# Altium PCB TrackCommanderCar.PcbDoc
Units mm, origin at the board's own origin, x right, y up, seen from the top; angles counter-clockwise.
Board outline 70 x 60 mm, 2 copper layers (Top Layer, Bottom Layer); 108 components, 77 nets, 428 pads, 54 vias.
Unrouted connection lines stored in the file: 101.
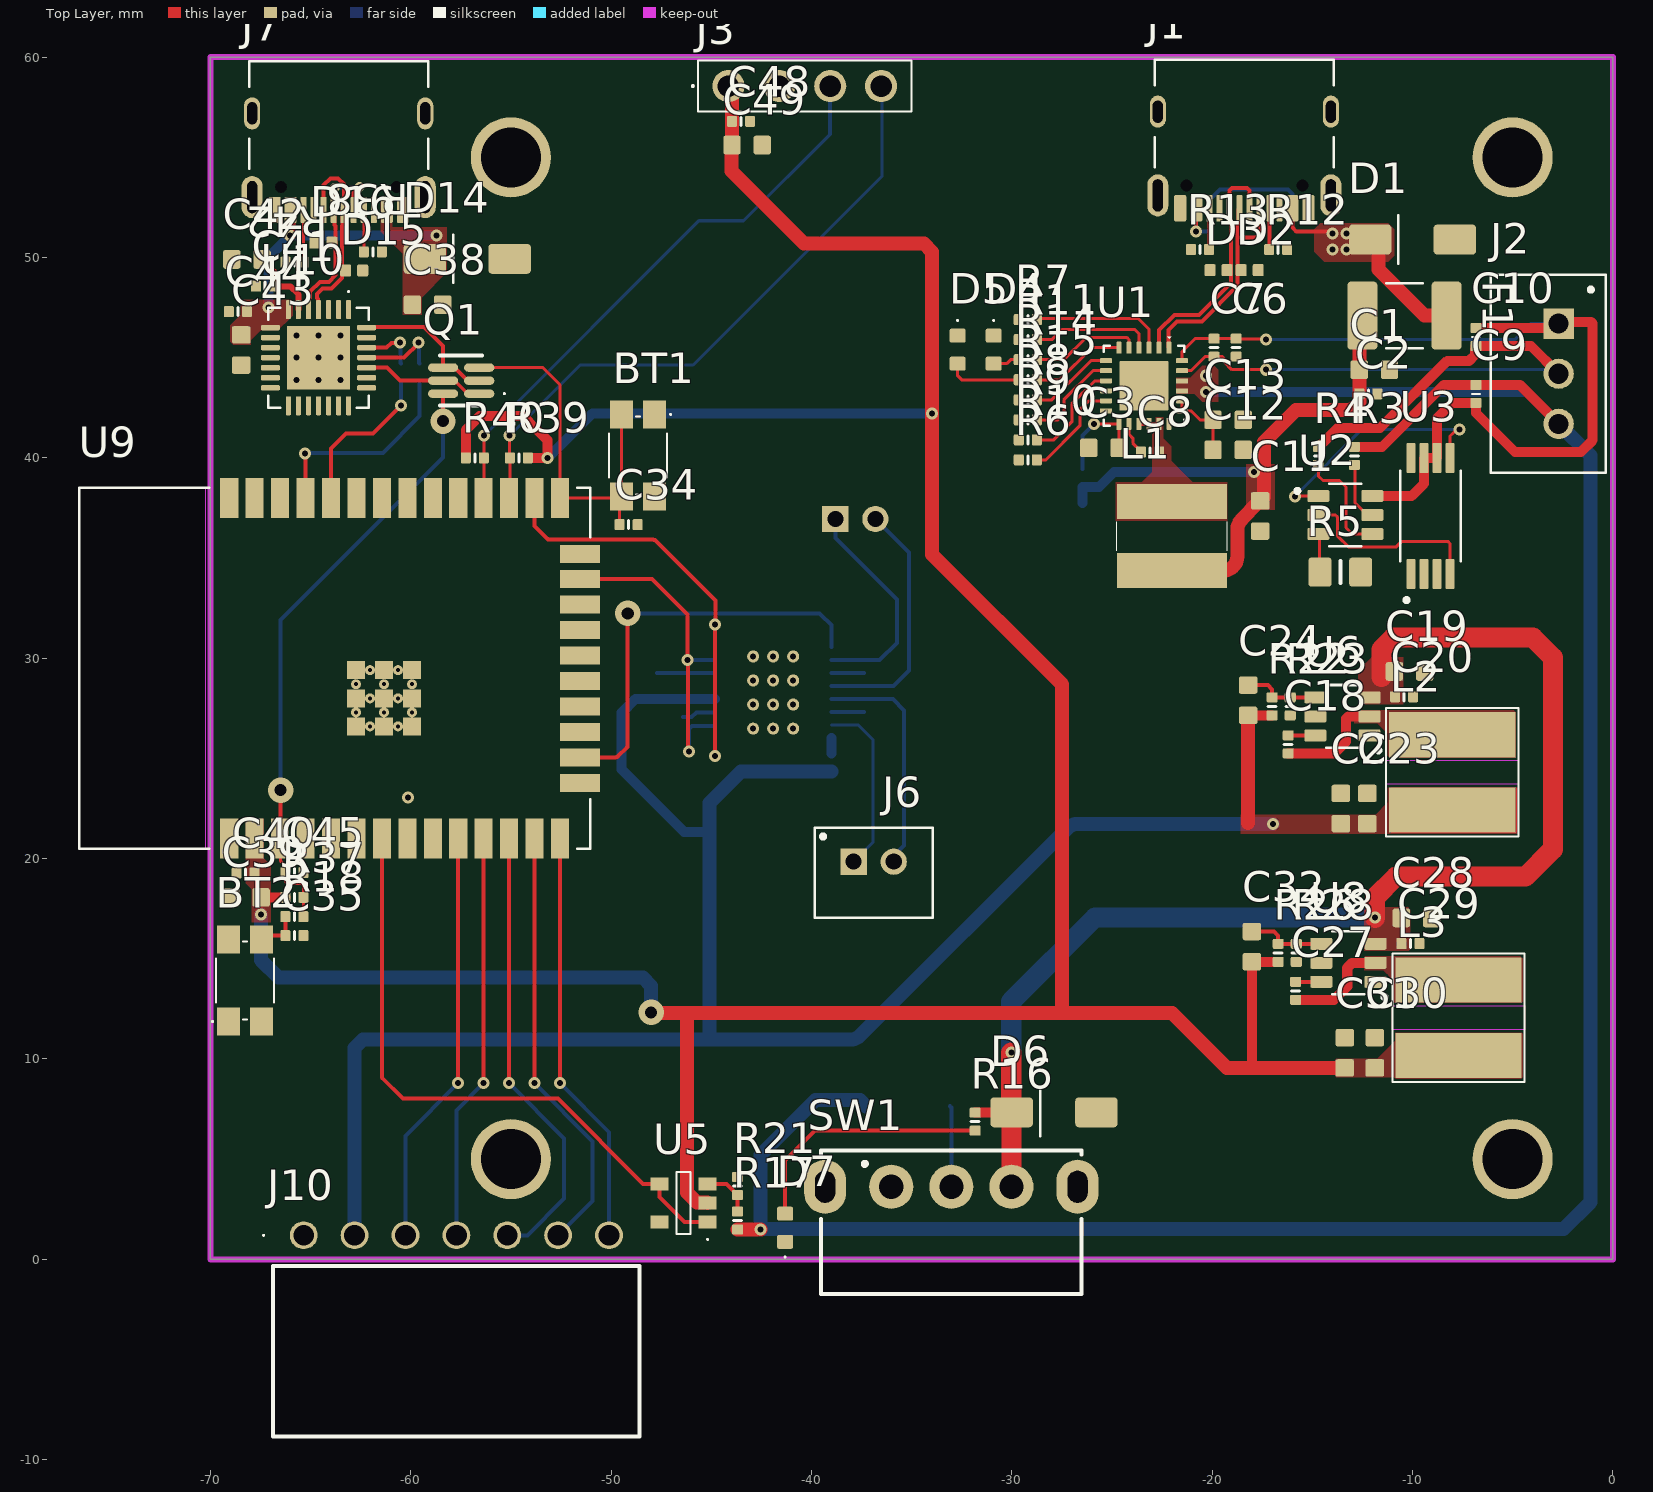
[diagram p0: Top Layer view]
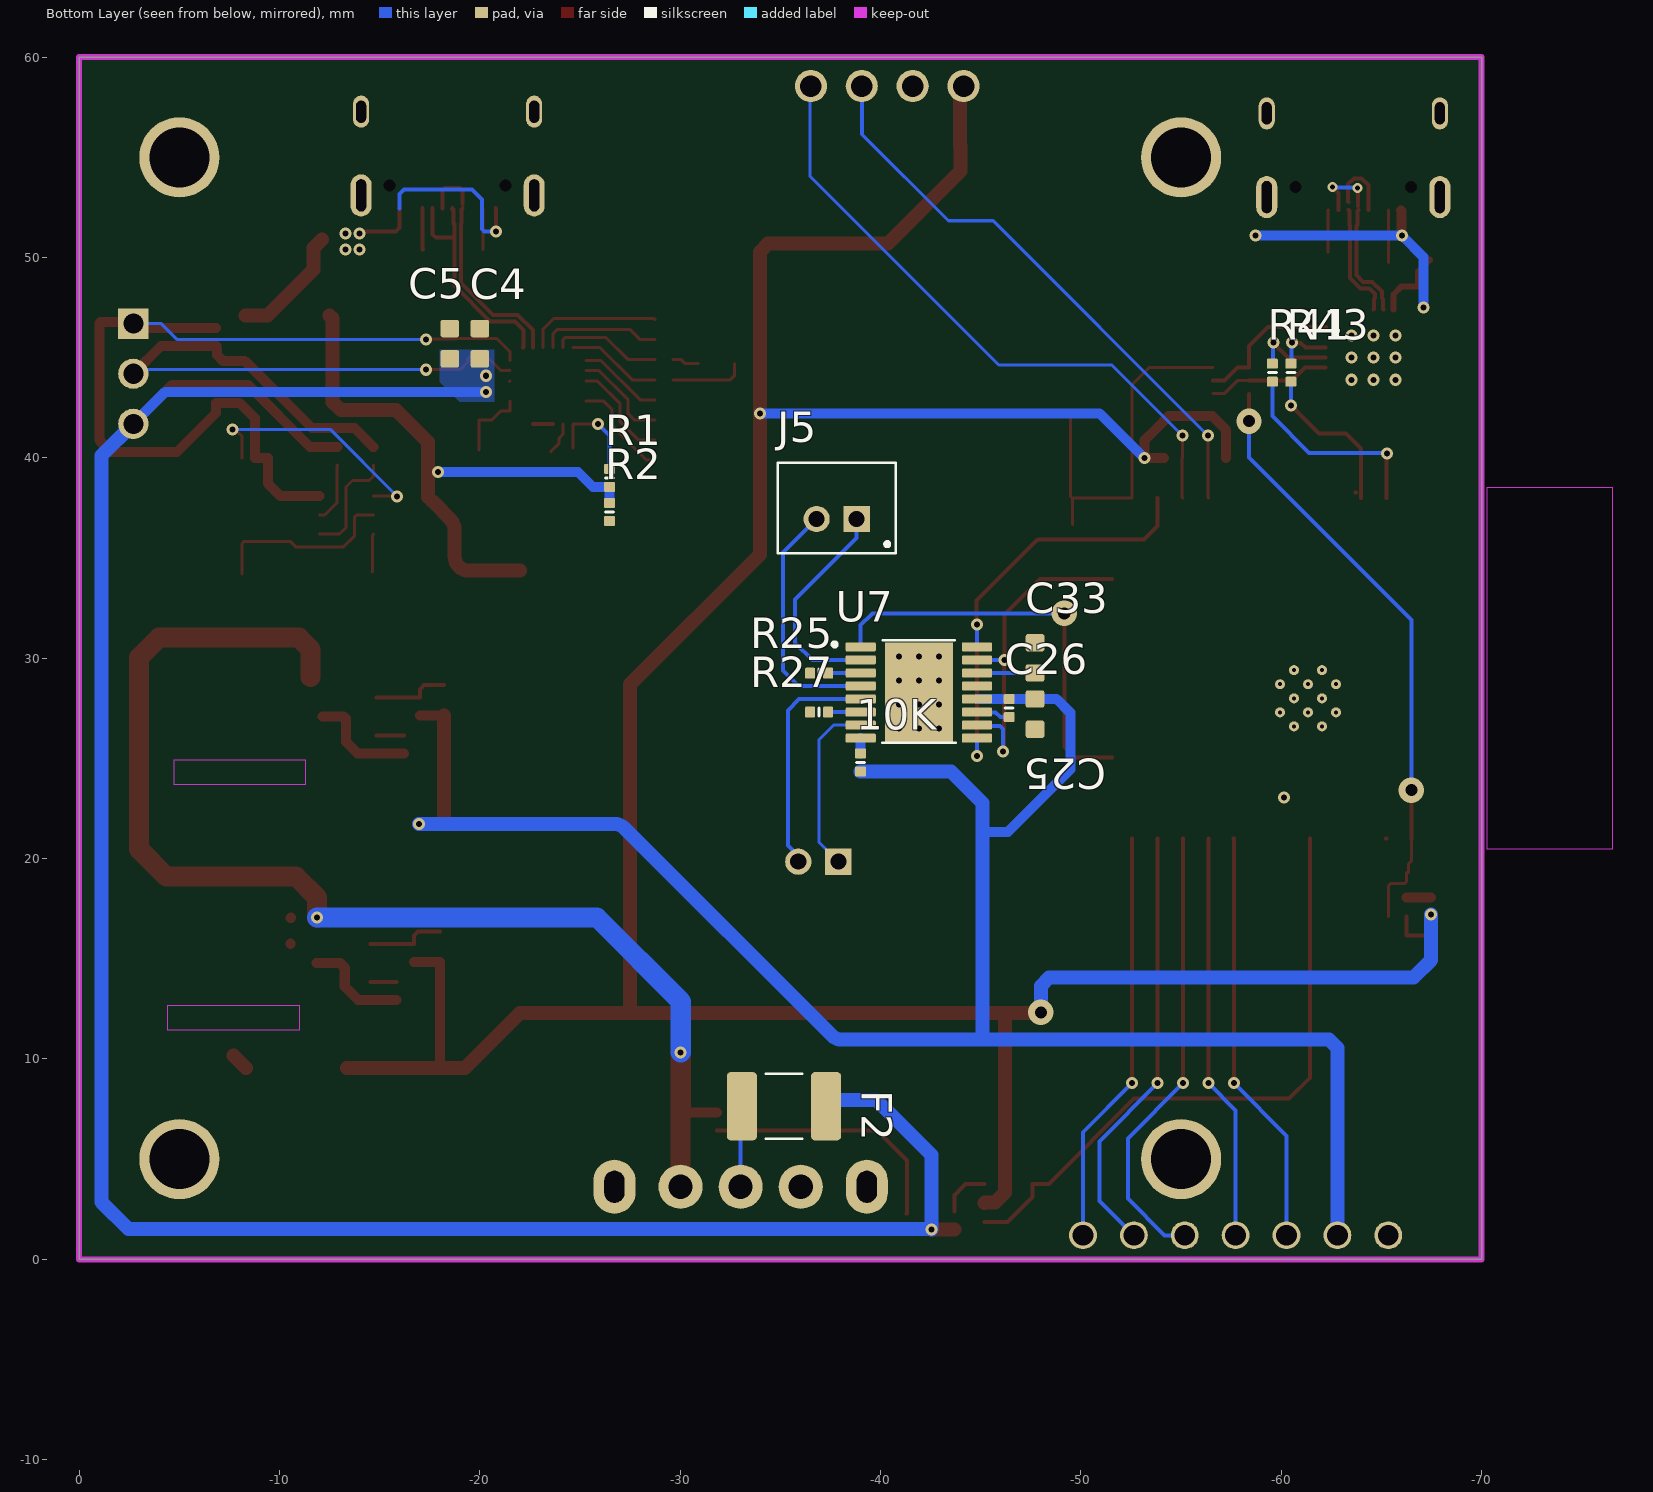
[diagram p1: Bottom Layer view, seen from below]

## Layer stack, top to bottom
Top Solder: solder mask 0.0102, Solder Resist, Dk 3.5
Top Layer: signal copper 0.0356
Dielectric 1: dielectric 0.32, FR-4, Dk 4.8
Bottom Layer: signal copper 0.0356
Bottom Solder: solder mask 0.0102, Solder Resist, Dk 3.5

## Board outline
-70,0 -70,60 0,60 0,0

## Design rules (kind name [scope] priority, off if disabled: settings)
BoardOutlineClearance [All] p1: gap=0.2 ignorepadtopadclearanceinfootprint=FALSE
Clearance [All] p1: gap=0.127 ignorepadtopadclearanceinfootprint=FALSE except(0.25: Arc-Hole Track-Hole SMDPad-Hole THPad-Hole Via-Hole Fill-Hole Poly-Hole Region-Hole Text-Hole)
ComponentClearance [All] p1: gap=0.127 collisioncheckmode=3 verticalgap=0.127 showdistances=TRUE
DiffPairsRouting [All] p1: maxlimit=0.254 minlimit=0.127 mostfreqgap=0.127 toplayer_minwidth=0.127 toplayer_maxwidth=25.4 toplayer_prefwidth=0.127 bottomlayer_minwidth=0.127 bottomlayer_maxwidth=25.4 bottomlayer_prefwidth=0.127 maxuncoupledlength=12.7
Height [All] p1: minheight=0 maxheight=1816.048 prefheight=12.7
HoleSize [All] p1: absolutevalues=TRUE maxlimit=6.3 minlimit=0.3 maxpercent=80.000 minpercent=20.000
HoleToHoleClearance [All] p1: gap=0.25 allowstackedmicrovias=FALSE
MinimumAnnularRing [All] p1: minimumring=0.076
MinimumSolderMaskSliver [All] p1: minsoldermaskwidth=0
PlaneClearance [All] p1: clearance=0.127
PlaneConnect PlaneConnectPowerPads [InPadClass('PowerPads')] p1: planeconnectstyle=Direct reliefexpansion=0.508 reliefentries=4 reliefconductorwidth=0.254 reliefairgap=0.254
PlaneConnect [All] p2: planeconnectstyle=Direct reliefexpansion=0.3 reliefentries=4 reliefconductorwidth=0.127 reliefairgap=0.127
PolygonConnect PolygonConnectPowerPads [All vs (InPadClass('PowerPads'))] p1: connectstyle=Direct reliefconductorwidth=0.254 reliefentries=4 polygonreliefangle="90 Angle" airgapwidth=0.254
PolygonConnect [All] p2: connectstyle=Direct reliefconductorwidth=0.127 reliefentries=4 polygonreliefangle="90 Angle" airgapwidth=0.127
RoutingVias [All] p1: holewidth=0.3 width=0.6 viastyle="Through Hole" minholewidth=0.2 minwidth=0.45 maxholewidth=0.6 maxwidth=6.6
SilkToSilkClearance [All] p1: silktosilkclearance=0
SilkToSolderMaskClearance [IsPad] p1: minsilkscreentomaskgap=0.127 clearancetoexposedcopper=TRUE
SolderMaskExpansion [All] p1: expansion=0.075 istentingtop=FALSE
SupplyNets "Schematic Supply Nets_5" [InNet('GND')] p1: voltage=0.000
SupplyNets "Schematic Supply Nets_7" [InNet('VDD')] p2: voltage=0.000
SupplyNets "Schematic Supply Nets_6" [InNet('+5V')] p3: voltage=0.000
SupplyNets "Schematic Supply Nets_4" [InNet('+3V3')] p4: voltage=0.000
SupplyNets "Schematic Supply Nets_3" [InNet('+5V USB')] p5: voltage=0.000
SupplyNets "Schematic Supply Nets_2" [InNet('VBUS')] p6: voltage=0.000
SupplyNets "Schematic Supply Nets_1" [InNet('+5V SYS')] p7: voltage=0.000
SupplyNets "Schematic Supply Nets" [InNet('+VBAT')] p8: voltage=0.000
Width [All] p1: maxlimit=25.4 minlimit=0.127 preferedwidth=0.127 minimp=50.000000 maximp=50.000000 favimp=50.000000
20 further rules are at their usual default settings.

## Classes and differential pairs
component class Sch_TrackCommanderCar_PowerPart: 10K C1 C2 C3 C4 C5 C6 C7 C8 C9 C10 C11 C12 C13 C18 C19 C20 C22 C23 C24 C25 C26 C27 C28 C29 C30 C31 C32 C33 D1 D2 D3 D4 D5 D6 D7 F1 F2 J1 J2 J5 J6 L1 L2 L3 R1 R2 R3 R4 R5 R6 R7 R8 R9 R10 R11 R12 R13 R14 R15 R16 R17 R21 R22 R23 R25 R26 R27 R28 SW1 U1 U2 U3 U5 U6 U7 U8
component class Sch_TrackCommenderCar_FunctionPart: BT1 BT2 C34 C35 C38 C39 C40 C41 C42 C43 C44 C45 C48 C49 D14 D15 D16 J3 J7 J10 Q1 R18 R37 R38 R39 R40 R41 R42 R43 U9 U10
differential pair USBCHARGER: +USBCHARGER_P -USBCHARGER_N
differential pair USB_MCU: +USB_MCU_P -USB_MCU_N

## Components (designator, comment, footprint, x,y, rotation, side; value= is the part's Value field where it differs from the comment)
10K "R24" R_0402 -38.998,24.796 r270 bottom
BT1 "Button SMD 3x4mm" "Button SMD 3x4mm" -47.824,42.169 r270 top
BT2 "Button SMD 3x4mm" "Button SMD 3x4mm" -69.092,11.874 r90 top
C1 "10uF" C_0603 -11.9,44.4 r180 top
C2 "0.1uF" C_0402 -12.2,43.2 r180 top
C3 "10uF 25V" C_0603 -25.4,40.5 r0 top
C4 "10uF 25V" C_0603 -20,45.7 r270 bottom
C5 "10uF 25V" C_0603 -18.5,45.7 r270 bottom
C6 "0.1uF" C_0402 -18.8,45.5 r270 top
C7 "0.1uF" C_0402 -19.9,45.5 r270 top
C8 "0.1uF" C_0402 -23.1,40.3 r0 top
C9 "0.1uF" C_0402 -6.83,43.195 r90 top
C10 "0.1uF" C_0402 -6.824,46.034 r270 top
C11 "10uF" C_0603 -17.6,37.1 r90 top
C12 "22uF" C_0603 -19.2,40.4 r180 top
C13 "22uF" C_0603 -19.2,41.9 r180 top
C18 "0.1uF" C_0402 -16.2,25.7 r90 top
C19 "22uF" C_0603 -10.144,29.341 r180 top
C20 "0.1uF" C_0402 -10.418,28.077 r180 top
C22 "22uF" C_0603 -13.574,22.5 r270 top
C23 "22uF" C_0603 -12.25,22.5 r270 top
C24 "75pF 50V" C_0603 -18.2,27.905 r270 top
C25 "10uF" C_0603 -47.708,27.211 r90 bottom
C26 "0.1uF" C_0402 -46.417,27.516 r90 bottom
C27 "0.1uF" C_0402 -15.828,13.4 r270 top
C28 "22uF" C_0603 -9.8,17.039 r180 top
C29 "0.1uF" C_0402 -10.105,15.761 r180 top
C30 "22uF" C_0603 -11.876,10.308 r270 top
C31 "22uF" C_0603 -13.376,10.308 r270 top
C32 "56pF 50V" C_0603 -18.013,15.605 r270 top
C33 "2.2uF" C_0603 -47.708,30.021 r270 bottom
C34 "0.1uF/50V(10%)" C_0402 -49.124,36.669 r180 top
C35 "0.1uF/50V(10%)" C_0402 -65.806,16.158 r180 top
C38 "10uF/10V (±10%)" C_0603 -59.156,47.647 r180 top
C39 "22uF" C_0603 -68.22,18.069 r0 top
C40 "0.1uF" C_0402 -68.236,19.278 r0 top
C41 "0.1uF" C_0402 -67.269,48.568 r0 top
C42 "4.7uF" C_0603 -68.172,49.905 r0 top
C43 "1uF" C_0603 -68.461,45.384 r90 top
C44 "0.1uF" C_0402 -68.623,47.301 r0 top
C45 "0.1uF/50V(10%)" C_0402 -65.8,19.3 r180 top
C48 "0.1uF" C_0402 -43.512,56.799 r180 top
C49 "10uF" C_0603 -43.207,55.616 r180 top
D1 "SMAJ8.0A" TVS_SMAJ_XA -10,50.9 r0 top
D2 "RCLAMP0521P" TVS_RCLAMP0521P -18.123,49.367 r180 top
D3 "RCLAMP0521P" TVS_RCLAMP0521P -19.678,49.367 r0 top
D4 "Led_Red" Led_0603 -30.9,45.4 r270 top
D5 "Led_Green" Led_0603 -32.7,45.4 r270 top
D6 "SMAJ9.0A" TVS_SMAJ_XA -27.887,7.339 r0 top
D7 "Led_Green" Led_0603 -41.307,1.576 r90 top
D14 "TVS_SMAJ_XA" TVS_SMAJ_XA -57.174,49.936 r0 top
D15 "TVS_RCLAMP0521P" TVS_RCLAMP0521P -62.817,49.353 r180 top
D16 "TVS_RCLAMP0521P" TVS_RCLAMP0521P -64.36,50.74 r0 top
F1 "MF-MSMF250" Fuse1812 -10.4,47.1 r180 top
F2 "MF-MSMF250" Fuse1812 -35.177,7.64 r0 bottom
J1 "USB TYPE C" USB_C_16Pin -15.19,52.46 r180 top
J2 "JST XH_3_2.5" "JST XH_3_2.5" -2.7,44.2 r90 top
J3 "OLED" "Header Female 1x4 2.54mm" -40.331,58.558 r0 top
J5 "R Motor connector" "JST PH_2_2.0" -37.807,36.951 r180 bottom
J6 "R Motor connector" "JST PH_2_2.0" -36.89,19.845 r180 top
J7 "USB_C" USB_C_16Pin -60.392,52.378 r180 top
J10 "Female Header Connector 7 pin Righ Angle" "7 Position Receptacle Connector 0.100\" (2.54mm) Through Hole, Right Angle" -57.72,1.2 r180 top
L1 "2.2uH 3.5A" "Inductor 2.2uH 3.5A" -22,36.1 r90 top
L2 "15uH" "Inductor SMD 15uH 1.1A" -8.014,24.308 r270 top
L3 "15uH" "Inductor SMD 15uH 1.1A" -7.701,12.057 r270 top
Q1 "UMH3NTN" "UMH3N SOT363" -57.48,43.856 r180 top
R1 "0.5R" R_0402 -26.475,39 r90 bottom
R2 "5K1" R_0402 -26.475,37.3 r90 bottom
R3 "330R" R_0402 -12.9,40.1 r90 top
R4 "330R" R_0402 -14.7,40.1 r90 top
R5 "2K" R_0805 -13.6,34.3 r180 top
R6 "60K" R_0402 -29.2,39.9 r0 top
R7 "120K" R_0402 -29.2,46.9 r0 top
R8 "1K" R_0402 -29.2,42.9 r0 top
R9 "1K" R_0402 -29.2,41.9 r0 top
R10 "120K" R_0402 -29.2,40.9 r0 top
R11 "51K" R_0402 -29.2,45.9 r0 top
R12 "5K1" R_0402 -16.7,50.4 r0 top
R13 "5K1" R_0402 -20.6,50.4 r180 top
R14 "100R" R_0402 -29.2,44.9 r0 top
R15 "100R" R_0402 -29.2,43.9 r0 top
R16 "1K" R_0402 -31.828,6.872 r270 top
R17 "10K" R_0402 -43.684,1.938 r270 top
R18 "0R" R_0402 -65.806,17.102 r0 top
R21 "2K4" R_0402 -43.687,3.66 r270 top
R22 "100K 1%" R_0402 -17,27.6 r270 top
R23 "13.3K 1%" R_0402 -16.1,27.6 r90 top
R25 "0.2R" R_0402 -36.931,29.254 r0 bottom
R26 "100K 1%" R_0402 -16.7,15.3 r270 top
R27 "0.2R" R_0402 -36.931,27.316 r0 bottom
R28 "22.1K 1%" R_0402 -15.8,15.3 r90 top
R37 "10K(5%)" R_0402 -65.806,18.07 r180 top
R38 "5K1" R_0402 -61.891,50.283 r180 top
R39 "2K4" R_0402 -54.6,40 r0 top
R40 "2K4" R_0402 -56.8,40 r180 top
R41 "0R(1%)" R_0402 -59.554,44.254 r270 bottom
R42 "5K1" R_0402 -65.797,49.766 r0 top
R43 "0R(1%)" R_0402 -60.478,44.254 r270 bottom
SW1 "SSW" Slide_SW_SS12F23G4 -33.015,3.621 r0 top
U1 "IP2326" IP2326_QFN_24 -23.4,43.6 r270 top
U2 "HY2120" HY2120 -13.35,37.15 r0 top
U3 "FS8205A" FS8205A -9.1,37.1 r90 top
U5 "MCP601T-I/OT" SOT23_OPAMP -46.38,2.82 r180 top
U6 "TPS54202DDCR" TPS54202DDCR -13.5,27.1 r180 top
U7 "DRV8833PWPR" DRV8833PWPR -41.908,28.291 r180 bottom
U8 "TPS54202DDCR" TPS54202DDCR -13.2,14.8 r180 top
U9 "ESP32_WROOM_32" ESP32_Wroom_32 -60.3,29.5 r90 top
U10 "CP2102" CP2102 -64.6,45 r270 top

## Footprints (in the part's own frame and the unit in brackets; to place one, negate y for a bottom-side part, rotate by r counter-clockwise, add the part's x,y. Pads: shape width x height; smd on the part's side, far side on the other; paste and mask are expansions set on the pad)
"7 Position Receptacle Connector 0.100\" (2.54mm) Through Hole, Right Angle" [mm] "7 Position Receptacle Connector 0.100\" (2.54mm) Through Hole, Right Angle"
  round 1.39 hole 1.04: 1(7.62,0) 2(5.08,0) 3(2.54,0) 4(0,0) 5(-2.54,0) 6(-5.08,0) 7(-7.62,0)
  silkscreen extent -9.15,-0.02 9.64,10.03, body extent -9.14,-0.2 9.14,10.03, height 2.46
"Button SMD 3x4mm" [mm] "Button SMD 3x4mm, Height 2.5 mm."
  rect 1.4x1.15 smd mask+0.1: 1(0,0) 2(4.1,0) 3(0,-1.65) 4(4.1,-1.65)
  silkscreen extent -0.02,-2.27 4,0.83, body extent -0.25,-2.22 4.35,0.58, height 1.9
C_0402 [mm]
  rrect25% 0.5x0.55 smd: 1(-0.45,0) 2(0.45,0)
  silkscreen extent 0,-0.2 0,0.2, body extent -0.5,-0.25 0.5,0.25, height 0.6
C_0603 [mm]
  rrect25% 0.87x0.93 smd mask+0.07: 1(-0.755,0) 2(0.755,0)
  body extent -0.8,-0.4 0.8,0.4, height 0.97
CP2102 [mm]
  rrect50% 0.95x0.26 smd: 1(-2.4,1.5) 2(-2.4,1) 3(-2.4,0.5) 4(-2.4,0) 5(-2.4,-0.5) 6(-2.4,-1) 7(-2.4,-1.5) 15(2.4,-1.5) 16(2.4,-1) 17(2.4,-0.5) 18(2.4,0) 19(2.4,0.5) 20(2.4,1) 21(2.4,1.5)
  rrect50% 0.26x0.95 smd: 8(-1.5,-2.4) 9(-1,-2.4) 10(-0.5,-2.4) 11(0,-2.4) 12(0.5,-2.4) 13(1,-2.4) 14(1.5,-2.4) 22(1.5,2.4) 23(1,2.4) 24(0.5,2.4) 25(0,2.4) 26(-0.5,2.4) 27(-1,2.4) 28(-1.5,2.4)
  rect 3.15x3.15 smd paste-0.585: 29(0,0)
  silkscreen extent -3.32,-2.5 2.5,2.5, body extent -2.5,-2.5 2.5,2.5, height 1
DRV8833PWPR [mm]
  rrect25% 1.5x0.45 smd mask+0.05: 1(-2.9,2.275) 2(-2.9,1.625) 3(-2.9,0.975) 4(-2.9,0.325) 5(-2.9,-0.325) 6(-2.9,-0.975) 7(-2.9,-1.625) 8(-2.9,-2.275) 9(2.9,-2.275) 10(2.9,-1.625) 11(2.9,-0.975) 12(2.9,-0.325) 13(2.9,0.325) 14(2.9,0.975) 15(2.9,1.625) 16(2.9,2.275)
  round 0.6 hole 0.3 mask+0: GND(-1,-1.8) GND(-1,-0.6) GND(-1,0.6) GND(-1,1.8) GND(0,-1.8) GND(0,-0.6) GND(0,0.6) GND(0,1.8) GND(1,-1.8) GND(1,-0.6) GND(1,0.6) GND(1,1.8)
  rect 3.4x5 smd paste-2539.97 mask+0: GND(0,0)
  silkscreen extent -4.3,-2.5 1.83,2.6, body extent -3.2,-2.5 3.2,2.5, height 1.2
ESP32_Wroom_32 [mm]
  rect 2x0.9 smd mask+0.07: 1(-8.5,8.755) 2(-8.5,7.485) 3(-8.5,6.215) 4(-8.5,4.945) 5(-8.5,3.675) 6(-8.5,2.405) 7(-8.5,1.135) 8(-8.5,-0.135) 9(-8.5,-1.405) 10(-8.5,-2.675) 11(-8.5,-3.945) 12(-8.5,-5.215) 13(-8.5,-6.485) 14(-8.5,-7.755) 25(8.5,-7.755) 26(8.5,-6.485) 27(8.5,-5.215) 28(8.5,-3.945) 29(8.5,-2.675) 30(8.5,-1.405) 31(8.5,-0.135) 32(8.5,1.135) 33(8.5,2.405) 34(8.5,3.675) 35(8.5,4.945) 36(8.5,6.215) 37(8.5,7.485) 38(8.5,8.755)
  rect 0.9x2 smd mask+0.07: 15(-5.715,-8.755) 16(-4.445,-8.755) 17(-3.175,-8.755) 18(-1.905,-8.755) 19(-0.635,-8.755) 20(0.635,-8.755) 21(1.905,-8.755) 22(3.175,-8.755) 23(4.445,-8.755) 24(5.715,-8.755)
  round 0.5 hole 0.2: GND(-2.897,0.332) GND(-2.897,1.732) GND(-2.197,-0.362) GND(-2.197,1.035) GND(-2.197,2.432) GND(-1.5,1.732) GND(-1.5,0.332) GND(-0.797,2.432) GND(-0.797,1.035) GND(-0.797,-0.362) GND(-0.097,1.732) GND(-0.097,0.332)
  rect 0.9x0.9 smd: GND(-2.897,2.432) GND(-2.897,-0.362) GND(-2.897,1.035) GND(-1.5,2.432) GND(-1.5,-0.362) GND(-1.5,1.035) GND(-0.097,-0.362) GND(-0.097,2.432) GND(-0.097,1.035)
  Keep-Out Layer region: 9,9.945 -9,9.945 -9,16.245 9,16.245
  Keep-Out Layer region: 9,9.945 -9,9.945 -9,16.245 9,16.245
  silkscreen extent -9,-9.25 9,16.25, body extent -9,-9.25 9,16.25, height 3.2
FS8205A [mm]
  rrect25% 1.5x0.45 smd mask+0.05: 1(-2.9,0.975) 2(-2.9,0.325) 3(-2.9,-0.325) 4(-2.9,-0.975) 5(2.9,-0.975) 6(2.9,-0.325) 7(2.9,0.325) 8(2.9,0.975)
  silkscreen extent -4.3,-1.52 2.25,1.52, body extent -3.2,-1.47 3.2,1.47, height 1.2
Fuse1812 [mm]
  rrect25% 1.5x3.4 smd mask+0.07: 1(-2.1,0) 2(2.1,0)
  silkscreen extent -0.9,-1.62 0.9,1.62, body extent -2.27,-1.62 2.27,1.62, height 0.85
"Header Female 1x4 2.54mm" [mm]
  round 1.605 hole 1.07: 1(-3.81,0) 2(-1.27,0) 3(1.27,0) 4(3.81,0)
  silkscreen extent -5.64,-1.27 5.34,1.27, body extent -5.33,-1.27 5.34,1.27, height 8.51
HY2120 [mm]
  rrect25% 1.1x0.6 smd mask+0.07: 1(-1.35,0.95) 2(-1.35,0) 3(-1.35,-0.95) 4(1.35,-0.95) 5(1.35,0) 6(1.35,0.95)
  silkscreen extent -2.5,-1.56 0.8,1.57, body extent -1.5,-1.5 1.5,1.5, height 1.1
"Inductor 2.2uH 3.5A" [mm]
  rect 1.75x5.5 smd mask+0.1: 1(-1.725,0) 1(-1.725,0) 2(1.725,0)
  silkscreen extent -0.72,-2.75 0.72,2.75, body extent -2.89,-2.6 2.9,2.6, height 4.5
"Inductor SMD 15uH 1.1A" [mm] "SMD Power Inductor 15uH 1.1A, Size 5.7x5.7x3.2 mm"
  rect 2.25x6.3 smd mask+0.1: 1(-1.875,0) 2(1.875,0)
  Keep-Out Layer region: -0.6,3.3 0.6,3.3 0.6,-3.3 -0.6,-3.3
  silkscreen extent -3.2,-3.3 3.2,3.3, body extent -3.02,-3.02 3.02,3.02, height 2.77
IP2326_QFN_24 [mm]
  rrect25% 0.6x0.25 smd mask+0.07: 1(-1.9,1.25) 2(-1.9,0.75) 3(-1.9,0.25) 4(-1.9,-0.25) 5(-1.9,-0.75) 6(-1.9,-1.25) 13(1.9,-1.25) 14(1.9,-0.75) 15(1.9,-0.25) 16(1.9,0.25) 17(1.9,0.75) 18(1.9,1.25)
  rrect25% 0.25x0.6 smd mask+0.07: 7(-1.25,-1.9) 8(-0.75,-1.9) 9(-0.25,-1.9) 10(0.25,-1.9) 11(0.75,-1.9) 12(1.25,-1.9) 19(1.25,1.9) 20(0.75,1.9) 21(0.25,1.9) 22(-0.25,1.9) 23(-0.75,1.9) 24(-1.25,1.9)
  rrect2% 2.45x2.45 smd paste-0.45 mask+0.07: GND(0,0)
  silkscreen extent -2.45,-2 2,2, body extent -2,-2 2,2, height 1
"JST PH_2_2.0" [mm]
  rect 1.308x1.308 / inner round 1.308 / far side rect 1.308x1.308 hole 0.8 mask+0.07: 1(1,0)
  round 1.308 hole 0.8 mask+0.07: 2(-1,0)
  silkscreen extent -2.95,-1.7 2.95,2.8, body extent -2.95,-1.7 2.95,2.8, height 6
"JST XH_3_2.5" [mm]
  rect 1.508x1.508 / inner round 1.508 / far side rect 1.508x1.508 hole 1 mask+0.07: 1(2.5,0)
  round 1.508 hole 1 mask+0.07: 2(0,0) 3(-2.5,0)
  silkscreen extent -4.95,-2.35 4.95,3.4, body extent -4.95,-2.35 4.95,3.4, height 7
Led_0603 [mm]
  rrect25% 0.7x0.8 smd mask+0.07: 1(-0.7,0) 2(0.7,0)
  silkscreen extent -1.48,-0.02 -1.43,0.03, body extent -0.8,-0.4 0.8,0.4, height 0.55
R_0402 [mm]
  rrect25% 0.5x0.55 smd: 1(-0.45,0) 2(0.45,0)
  silkscreen extent 0,-0.2 0,0.2, body extent -0.5,-0.25 0.5,0.25, height 0.3
R_0805 [mm]
  rrect25% 1.15x1.45 smd mask+0.07: 1(-1.016,0)
  rrect25% 1.15x1.45 smd paste-2539.97 mask+0.07: 2(1.016,0)
  silkscreen extent 0,-0.55 0,0.55, body extent -1,-0.63 1,0.63, height 0.65
Slide_SW_SS12F23G4 [mm]
  round 2.2 hole 1.2 mask+0.07: 1(-3,0) 2(0,0) 3(3,0)
  oval 2.1x2.7 hole 1 slot 1.6 at 90 deg mask+0.07: SH(-6.3,0) SH(6.3,0)
  silkscreen extent -6.5,-5.35 6.5,1.8, body extent -6.5,-10.35 6.5,0.45, height 5.6
SOT23_OPAMP [mm]
  rect 0.9x0.65 smd: 1(-1.2,0.95) 2(-1.2,0) 3(-1.2,-0.95) 4(1.2,-0.95) 5(1.2,0.95)
  silkscreen extent -1.23,-1.55 0.35,1.85, body extent -0.9,-1.55 0.9,1.55, height 1.45
TPS54202DDCR [mm]
  rrect25% 1.1x0.6 smd mask+0.07: 1(-1.35,0.95) 2(-1.35,0) 3(-1.35,-0.95) 4(1.35,-0.95) 5(1.35,0) 6(1.35,0.95)
  silkscreen extent -1.9,-1.56 0.8,1.8, body extent -1.5,-1.5 1.5,1.5, height 1.1
TVS_RCLAMP0521P [mm]
  rrect25% 0.55x0.6 smd mask+0.05: 1(-0.425,0) 2(0.425,0)
  body extent -0.55,-0.36 0.55,0.36, height 0.56
TVS_SMAJ_XA [mm]
  rrect25% 2.12x1.5 smd mask+0.07: 1(-2.115,0) 2(2.115,0)
  silkscreen extent -0.7,-1.2 -0.7,1.2, body extent -2.57,-1.28 2.57,1.28, height 2.5
"UMH3N SOT363" [mil]
  oval 59.4x16.37 smd paste+0 mask+0: 1(-35.5,25.59)
  rrect100% 59.4x16.37 smd paste+0 mask+0: 2(-35.5,0) 3(-35.5,-25.59) 4(35.5,-25.59) 5(35.5,0) 6(35.5,25.59)
  silkscreen extent -86,-49 41,49, body extent -41,-39 41,39, height 39
USB_C_16Pin [mm]
  rrect20% 0.6x1.3 smd mask+0.05: A1_B12(0,0) A4_B9(0.8,0) B1_A12(6.4,0) B4_A9(5.6,0)
  rrect20% 0.3x1.3 smd mask+0.05: A5(1.95,0) A6(2.95,0) A7(3.45,0) A8(4.45,0) B5(4.95,0) B6(3.95,0) B7(2.45,0) B8(1.45,0)
  oval 1.05x2.1 hole 0.5 slot 1.6 at 90 deg mask+0.05: S1(-1.12,-0.64) S2(7.52,-0.64)
  oval 0.8x1.6 hole 0.5 slot 1.1 at 90 deg mask+0.05: S3(-1.12,-4.82) S4(7.52,-4.82)
  round 0 hole 0.6 mask+0.35: ""(0.31,-1.14) ""(6.09,-1.14)
  silkscreen extent -1.27,-7.42 7.67,-2.05, body extent -1.27,-7.46 7.67,0.35, height 3.26

## Part data
10K R1 R2 R3 R4 R6 R7 R8 R9 R10 R11 R12 R13 R14 R15 R16 R17 R18 R21 R22 R23 R25 R26 R27 R28 R37 R38 R39 R40 R41 R42 R43: library part R0402
C1 C3 C4 C5 C11 C12 C13 C19 C22 C23 C24 C25 C28 C30 C31 C32 C33 C38 C39 C42 C43 C49: library part C0603
C2 C6 C7 C8 C9 C10 C18 C20 C26 C27 C29 C34 C35 C40 C41 C44 C45 C48: library part C0402
D1 D6: library part TVS_SMAJ_XA
D2 D3: library part TVS_RCLAMP0521P
F1 F2: library part Fuse1812
J1: library part USB_C, "16_PIN"
J3: library part "Header Female 1x4 2.54mm"
J5 J6: library part "JST PH_2_2.0"
J7: "16_PIN"
L1: library part "Inductor 2.2uH 3.5A"
L2 L3: library part "Inductor 15uH 1.1A", "15uH 1.1A, size 5.7x5.7x3.2 mm"
Q1: "Small Signal Bipolar Transistor, 0.1A I(C), 50V V(BR)CEO, 2-Element, NPN, Silicon", Case/Package=SOT-363, Collector Base Voltage (VCBO)=50V, Collector Emitter Saturation Voltage=300mV, Continuous Collector Current=100mA, Emitter Base Voltage (VEBO)=5V, Manufacturer=ROHM, Max Junction Temperature (Tj)=150°C, Max Power Dissipation=150mW, Min Operating Temperature=-55°C, Supplier Part Number 1=UMH3NTNCT-ND, Transition Frequency=250MHz, Category=BJTs, Collector Emitter Breakdown Voltage=50V, Collector Emitter Voltage (VCEO)=50V, ComponentLink1Description=https://datasheet.octopart.com:443/UMH3NTN-ROHM-datasheet-181221233.pdf?src-supplier=Farnell, ComponentLink1URL=https://datasheet.octopart.com:443/UMH3NTN-ROHM-datasheet-181221233.pdf?src-supplier=Farnell, ComponentLink2Description=https://datasheet.octopart.com:443/UMH3NTN-Rohm-datasheet-82997545.pdf?src-supplier=Farnell, ComponentLink2URL=https://datasheet.octopart.com:443/UMH3NTN-Rohm-datasheet-82997545.pdf?src-supplier=Farnell, ComponentLink3Description=https://sigma.octopart.com:443/154577397/technical_drawing/ROHM-UMH3NTN.pdf?src-supplier=Upverter, ComponentLink3URL=https://sigma.octopart.com:443/154577397/technical_drawing/ROHM-UMH3NTN.pdf?src-supplier=Upverter, ComponentLink4Description=https://datasheet.octopart.com:443/UMH3NTN-Rohm-datasheet-548145.pdf?src-supplier=Newark, ComponentLink4URL=https://datasheet.octopart.com:443/UMH3NTN-Rohm-datasheet-548145.pdf?src-supplier=Newark, ComponentLink5Description=https://datasheet.octopart.com:443/UMH3NTN-Rohm-datasheet-41569966.pdf?src-supplier=Newark, ComponentLink5URL=https://datasheet.octopart.com:443/UMH3NTN-Rohm-datasheet-41569966.pdf?src-supplier=Newark, ComponentLink6Description=https://datasheet.octopart.com:443/UMH3NTN-Rohm-datasheet-142144791.pdf?src-supplier=Rohm+SCT, ComponentLink6URL=https://datasheet.octopart.com:443/UMH3NTN-Rohm-datasheet-142144791.pdf?src-supplier=Rohm+SCT, ComponentLink7Description=https://datasheet.octopart.com:443/UMH3NTN-Rohm-datasheet-61695679.pdf?src-supplier=Future+Electronics, ComponentLink7URL=https://datasheet.octopart.com:443/UMH3NTN-Rohm-datasheet-61695679.pdf?src-supplier=Future+Electronics, ComponentLink8Description=https://datasheet.octopart.com:443/UMH3NTN-Rohm-datasheet-21405252.pdf?src-supplier=element14+APAC, ComponentLink8URL=https://datasheet.octopart.com:443/UMH3NTN-Rohm-datasheet-21405252.pdf?src-supplier=element14+APAC, ComponentLink9Description=https://datasheet.octopart.com:443/UMH3NTN-Rohm-datasheet-31182.pdf?src-supplier=DigiKey, ComponentLink9URL=https://datasheet.octopart.com:443/UMH3NTN-Rohm-datasheet-31182.pdf?src-supplier=DigiKey, ComponentLink10Description=https://datasheet.octopart.com:443/UMH3NTN-Rohm-datasheet-14064263.pdf?src-supplier=iiiC, ComponentLink10URL=https://datasheet.octopart.com:443/UMH3NTN-Rohm-datasheet-14064263.pdf?src-supplier=iiiC, Current Rating=100mA, Element Configuration=Dual, Height=1mm, hFE Min=100, Lead Free="Lead Free", Lifecycle Status=Production, Manufacturer Part Number=UMH3NTN, Max Breakdown Voltage=50V, Max Collector Current=100mA, Max Operating Temperature=150°C, Max Output Current=100mA, Mount="Surface Mount", Number of Elements=2, Number of Pins=6, Number of Terminals=6, Operating Supply Voltage=50V, Polarity=NPN, Power Dissipation=150mW, Pricing 1="1=0.47, 10=0.29, 100=0.1836, 500=0.1375, 1000=0.12259 (USD)", Radiation Hardening=No, REACH SVHC=Yes, RoHS=Compliant, Schedule B=8541210080|8541210080|8541210080|8541210080|8541210080, Stock 1=7536, Supplier 1=DigiKey, Voltage Rating (DC)=50V
R5: library part R0805
U2: "Battery protection"
U3: "Back to back MOSFET"
U5: "Op Amp Single Low Power Amplifier R-R O/P 6V Automotive 5-Pin SOT-23 T/R", Case/Package=SOT-23, Input Bias Current=60pA, Input Offset Voltage (Vos)=2mV, Manufacturer=Microchip, Max Operating Temperature=85°C, Max Output Current=30mA, Max Supply Current=2mA, Max Supply Voltage=6V, Min Operating Temperature=-40°C, Min Supply Voltage=2.7V, Nominal Supply Current=230µA, Operating Supply Voltage=5.5V, Output Current=22mA, Power Supply Rejection Ratio (PSRR)=80dB, Voltage=5V, Voltage Gain=115dB, Bandwidth=2.8MHz, Category="Amplifiers - Op Amps, Buffer, Instrumentation", Common Mode Rejection Ratio=75dB, ComponentLink1Description=https://datasheet.octopart.com:443/MCP601T-I/OT-Microchip-datasheet-8327811.pdf?src-supplier=Augswan, ComponentLink1URL=https://datasheet.octopart.com:443/MCP601T-I/OT-Microchip-datasheet-8327811.pdf?src-supplier=Augswan, ComponentLink2Description=https://datasheet.octopart.com:443/MCP601T-I/OT-Microchip-datasheet-7869.pdf?src-supplier=element14, ComponentLink2URL=https://datasheet.octopart.com:443/MCP601T-I/OT-Microchip-datasheet-7869.pdf?src-supplier=element14, ComponentLink3Description=https://datasheet.octopart.com:443/MCP601T-I-OT-Microchip-datasheet-170283493.pdf?src-supplier=Microchip, ComponentLink3URL=https://datasheet.octopart.com:443/MCP601T-I-OT-Microchip-datasheet-170283493.pdf?src-supplier=Microchip, ComponentLink4Description=https://datasheet.octopart.com:443/MCP601T-I-OT-Microchip-datasheet-158592061.pdf?src-supplier=SHENGYU+ELECTRONICS, ComponentLink4URL=https://datasheet.octopart.com:443/MCP601T-I-OT-Microchip-datasheet-158592061.pdf?src-supplier=SHENGYU+ELECTRONICS, ComponentLink5Description=https://datasheet.octopart.com:443/MCP601T-I/OT-Microchip-datasheet-9917688.pdf?src-supplier=RS+(Formerly+Allied+Electronics), ComponentLink5URL=https://datasheet.octopart.com:443/MCP601T-I/OT-Microchip-datasheet-9917688.pdf?src-supplier=RS+(Formerly+Allied+Electronics), ComponentLink6Description=https://datasheet.octopart.com:443/MCP601T-I-OT-Microchip-datasheet-140568181.pdf?src-supplier=Arrow.cn, ComponentLink6URL=https://datasheet.octopart.com:443/MCP601T-I-OT-Microchip-datasheet-140568181.pdf?src-supplier=Arrow.cn, ComponentLink7Description=http://sigma.octopart.com:80/188449423/materials_sheet/Microchip-MCP601T-I-OT.pdf?src-supplier=Compliance+Statements, ComponentLink7URL=http://sigma.octopart.com:80/188449423/materials_sheet/Microchip-MCP601T-I-OT.pdf?src-supplier=Compliance+Statements, ComponentLink8Description=http://sigma.octopart.com:80/conflict_mineral_statement/Microchip-company-68.pdf?src-supplier=Compliance+Statements, ComponentLink8URL=http://sigma.octopart.com:80/conflict_mineral_statement/Microchip-company-68.pdf?src-supplier=Compliance+Statements, ComponentLink9Description=http://sigma.octopart.com:80/conflict_mineral_statement/Microchip-company-69.pdf?src-supplier=Compliance+Statements, ComponentLink9URL=http://sigma.octopart.com:80/conflict_mineral_statement/Microchip-company-69.pdf?src-supplier=Compliance+Statements, ComponentLink10Description=http://sigma.octopart.com:80/reach_statement/Microchip-company-70.pdf?src-supplier=Compliance+Statements, ComponentLink10URL=http://sigma.octopart.com:80/reach_statement/Microchip-company-70.pdf?src-supplier=Compliance+Statements, ComponentLink11Description=http://sigma.octopart.com:80/rohs_statement/Microchip-company-71.pdf?src-supplier=Compliance+Statements, ComponentLink11URL=http://sigma.octopart.com:80/rohs_statement/Microchip-company-71.pdf?src-supplier=Compliance+Statements, Country of Assembly="Malaysia, Thailand", Country of Fabrication="United States of America", Country of Origin="Malaysia, Thailand", Export Control Classification Number (ECCN) Code=EAR99, Gain Bandwidth Product=2.8MHz, Harmonized Tariff Schedule (HTS) Code=8542.33.0001, Height=1.3mm, Introduction Date=2002-01-01, Lead Free="Lead Free", Length=3.1mm, Lifecycle Status=Production, Manufacturer Part Number=MCP601T-I/OT, Mount="Surface Mount", Number of Amplifiers=1, Number of Channels=1, Number of Circuits=1, Number of Elements=1, Number of Pins=5, Packaging="Cut Tape", Pricing 1="3000=0.4064 (USD)", Projected EOL Date=2034-01-01, Radiation Hardening=No, REACH SVHC=No, RoHS=Compliant, Schedule B="8542330000, 8542330000|8542330000|8542330000|8542330000|8542330000", Settling Time=4.5µs, Slew Rate=2.3V/µs, Stock 1=12000, Supplier 1="Arrow Electronics", Supplier Part Number 1=MCP601T-I/OT, Width=1.8mm
U7: "Dual H-Bridge Motor Driver"

## Free pads (board coordinates)
  round 4 hole 3 mask+0.1: 7(-5,5) 7(-5,5) 7(-5,55) 12(-55,5) 12(-55,55)

## Via types
v1: diameter 0.6, hole 0.3, Top Layer to Bottom Layer, 48 vias
v2: diameter 1.27, hole 0.6, Top Layer to Bottom Layer, 4 vias
v3: diameter 0.5, hole 0.25, Top Layer to Bottom Layer, 2 vias

## Nets (pads, with @x,y where several pads share a name; then routed paths per layer and width w, separated by ;. In a path a pad name is that pad's centre, name@x,y a point inside that pad or via, vN(x,y) a via of type N, cw(c..) or ccw(c..) an arc to the next point about the centre after c; other vN are vias at no path point)
+3V3: C30.2 C31.2 C32.2 C39.2 C40.2 C48.2 C49.2 J3.1 L3.2 R26.2 R37.2 R39.2 R40.2 U5.2 U9.2 | length 163.3
  Top Layer w0.5: C39.2 R37.2 R37.2 ; R40.2 -57.25,41.397 -56.558,42.089 -54.381,42.089 -53.741,41.449 -53.18,40.888 -53.18,40.009 v1@-53.166,39.995 ; R39.2 -54.15,39.995 v1@-53.166,39.995 ; v1(-53.161,39.99) v1@-53.166,39.995 ; -17.894,9.553 -18.013,9.671 C32.2 R26.2
  Top Layer w0.7: v2(-48.001,12.325) -47.961,12.284 -46.203,12.284 ; U5.2 -45.205,2.845 -45.705,2.845 -46.203,3.343 -46.203,12.284 ; J3.1 -43.968,58.385 -43.968,56.805 C48.2 C49.2 -43.989,55.589 -43.989,54.317 -40.367,50.695 -34.39,50.695 -33.98,50.285 -33.98,35.18 -27.48,28.68 -27.48,12.284 ; C31.2 -17.894,9.553 -19.263,9.553 -21.995,12.284 -27.48,12.284 ; L3.2@-8.33,9.553 L3.2 ; -46.203,12.284 -27.48,12.284
  Bottom Layer w0.5: v1(-53.161,39.99) -50.936,42.215 v1(-33.976,42.215)
  Bottom Layer w0.7: v1(-67.47,17.202) -67.47,14.928 -66.598,14.056 -48.411,14.056 -48.001,13.646 v2(-48.001,12.325)
+5V: 10K.2 C22.2 C23.2 C24.2 C25.2 C26.2 J10.2 L2.2 R22.2 U7.12 | length 98.3
  Top Layer w0.5: C24.2 R22.2
  Top Layer w0.7: -18.2,21.766 C24.2
  Bottom Layer w0.5: -45.089,21.337 -46.356,21.337 -49.466,24.446 -49.466,27.286 -48.786,27.966 C25.2 C26.2 U7.12
  Bottom Layer w0.7: J10.2 -62.8,10.552 -62.39,10.962 -45.089,10.962 ; 10K.2 -43.521,24.346 -45.089,22.778 -45.089,21.337 -45.089,10.962 ; v1(-16.969,21.735) -26.711,21.735 ccw(c-26.711,21.035) -27.205,21.531 -37.57,11.166 cw(c-38.064,11.662) -38.064,10.962 -45.089,10.962
"+5V SYS": C1.2 C2.2 C11.2 F1.2 L1.1 R1.1 R2.2 | length 29.3
  Top Layer w0.7: L1.1@-22,34.375 -19.44,34.375 ccw(c-19.44,35.075) -18.74,35.075 -18.74,36.425 cw(c-18.04,36.425) -18.544,36.911 -17.715,37.77 C11.2 ; C11.2@-17.4,38.04 -17.4,40.8 -15.814,42.386 -13.06,42.386 -12.65,42.796 C2.2 -12.65,44.395 C1.2 -12.655,46.945 F1.2
  Bottom Layer w0.5: R2.2 R1.1 -25.65,38.55 -24.9,39.3 v1(-17.9,39.3)
"+5V USB": D1.1 F1.1 J1.A4_B9 J1.B4_A9 | length 17.4
  Top Layer w0.2: v1(-20.8,51.3) -20.795,51.305 -20.795,52.455 J1.B4_A9 ; J1.A4_B9 -15.99,51.49 -15.8,51.3 v1@-14.2,51.3
  Top Layer w0.7: D1.1 -11.7,50.485 -11.7,49.4 -9.4,47.1 F1.1
  Bottom Layer w0.2: v1(-20.8,51.3) -20.217,51.3 -20.1,51.417 -20.1,52.9 -19.6,53.4 -16.219,53.4 -15.99,53.171 -15.99,52.46
  other v1: -14,50.4 -13.3,50.4 -14,51.2 -13.3,51.2
+VBAT: C19.2 C20.2 C28.2 C29.2 D6.1 R16.1 SW1.3 U6.3 U8.3 | length 62
  Top Layer w0.5: R16.1 D6.1@-30.008,7.322 ; C28.2@-10.564,17.048 C28.2 ; C29.2@-10.555,15.75 C29.2
  Top Layer w1: v1(-30.024,10.319) -30.024,7.361 D6.1 -30.008,7.332 -30.008,7.322 -30.008,3.628 SW1.3 ; v1@-11.871,17.048 v1(-11.88,17.057) -11.88,18.051 -10.824,19.107 -4.347,19.107 -2.994,20.46 -2.994,30.035 -3.992,31.033 -10.962,31.033 -11.548,30.447 -11.548,29.064
  Bottom Layer w1: v1(-30.024,10.319) -30.024,12.88 -25.846,17.057 v1(-11.88,17.057)
BAT+: C4.2 C5.2 C6.2 C9.2 F2.1 J2.3 R3.2 R17.2 U1.21 U1.22 | length 123.5
  Top Layer w0.15: U1.22 U1.22@-21.475,43.825
  Top Layer w0.5: R3.2 -11.521,40.55 -8.425,43.645 C9.2 -4.645,43.645 J2.3 J2.3@-2.79,41.61
  Top Layer w0.7: R17.2 v1(-42.544,1.488)
  Bottom Layer w0.5: v1(-20.3,43.3) -4.3,43.3 J2.3
  Bottom Layer w0.7: v1(-42.544,1.488) -42.544,5.205 -39.805,7.944 -37.581,7.944 F2.1 ; v1@-42.512,1.52 -27.667,1.52 -27.665,1.518 -2.455,1.518 -1.123,2.85 -1.123,40.123 J2.3
  other v1: -20.3,44.1
BAT-: C6.1 C7.1 C9.1 C10.1 J2.1 U1.24 U2.6 U3.6 U3.7 | length 48.1
  Top Layer w0.15: U1.24 -21.5,45.3 -20.85,45.95 C7.1 C6.1 -18.775,45.925 -17.325,45.925 v1(-17.3,45.9)
  Top Layer w0.5: U2.6 -10.036,38.1 -9.425,38.711 U3.7 U3.6 -8.775,41.982 -8.012,42.745 C9.1 -6.83,42.243 -4.881,40.294 -1.598,40.294 -1.006,40.886 -1.006,46.702 -1.094,46.79 -2.61,46.79 J2.1 -2.916,46.484 C10.1
  Bottom Layer w0.15: v1(-17.3,45.9) -4.9,45.9 -4.1,46.7 J2.1
BATM: C7.2 C10.2 J2.2 R4.2 U1.23 | length 34.5
  Top Layer w0.15: U1.23@-21.465,44.385 U1.23 -21.05,44.35 -20.35,45.05 C7.2 -19.488,45.05 -19.4,44.962 -19.4,44.785 -19.015,44.4 v1(-17.3,44.4)
  Top Layer w0.5: R4.2 -14.675,40.55 -13.738,41.487 -11.617,41.487 -8.26,44.844 -7.167,44.844 -6.874,45.137 -6.874,45.399 -6.849,45.424 -6.849,45.584 -4.084,45.584 J2.2
  Bottom Layer w0.15: v1(-17.3,44.4) -2.9,44.4 J2.2
"BUCK1 BOOT": C18.2 U6.6 | length 1.4
  Top Layer w0.2: C18.2 U6.6
"BUCK1 FB": C24.1 R22.1 R23.2 U6.4 | length 3.8
  Top Layer w0.2: C24.1 -17.21,28.66 -17,28.45 R22.1 R23.2 U6.4
"BUCK1 SW": C18.1 L2.1 U6.2 | length 5.5
  Top Layer w0.5: C18.1 -13.9,25.25 -13.306,25.844 -13.306,26.983 -13.189,27.1 U6.2
"BUCK2 BOOT": C27.1 U8.6 | length 1.3
  Top Layer w0.2: C27.1 U8.6
"BUCK2 FB": C32.1 R26.1 R28.2 U8.4 | length 3.9
  Top Layer w0.2: C32.1 -16.91,16.36 -16.7,16.15 R26.1 R28.2 U8.4
"BUCK2 SW": C27.2 L3.1 U8.2 | length 5.3
  Top Layer w0.5: C27.2 -13.92,12.95 -13.255,13.615 -13.255,14.552 -13.007,14.8 U8.2
BVM: U5.1 U5.4 U9.7 | length 31.6
  Top Layer w0.2: U9.7 -61.435,9.063 -60.391,8.018 -52.647,8.018 -48.399,3.77 U5.4 -47.58,3.12 -46.33,1.87 U5.1
"DRV AISEN": R25.1 U7.3 | length 1.6
  Bottom Layer w0.2: U7.3 -39.002,29.26 -37.387,29.26 R25.1
"DRV BISEN": R27.1 U7.6 | length 1.6
  Bottom Layer w0.2: U7.6 R27.1
"DRV NFLT": 10K.1 U7.8 | length 0.8
  Bottom Layer w0.5: U7.8 -39.003,26.011 -39.003,25.246 10K.1
"DRV NSLP": U7.1 U9.16 | length 20.7
  Top Layer w0.2: U9.16 -49.782,25.055 ccw(c-49.782,25.255) -49.641,25.113 -49.224,25.53 ccw(c-49.366,25.671) -49.166,25.671 v2(-49.166,32.244)
  Bottom Layer w0.2: v2(-49.166,32.244) -39.676,32.244 cw(c-39.676,32.044) -39.534,32.185 -39.008,31.659 U7.1
"DRV VCP": C26.1 U7.11 | length 1.7
  Bottom Layer w0.2: C26.1 -45.981,27.066 -45.745,27.302 U7.11@-44.808,27.302
"DRV VINT": C33.2 U7.14 | length 2.9
  Bottom Layer w0.2: C33.2 U7.14
DTR: Q1.2 Q1.4 U10.28 | length 7.4
  Top Layer w0.2: U10.28@-62.231,46.522 -59.325,46.522 -58.382,45.58 Q1.4 -57.805,44.506 -57.155,43.856 Q1.2
EN: C45.2 Q1.6 R18.2 R37.1 U9.3 | length 30.3
  Top Layer w0.15: U9.3@-66.506,20.991 -66.506,19.897 -66.35,19.741 C45.2@-66.35,19.3 ; C45.2 -66.25,18.847 -66.162,18.76 -65.464,18.76 -65.347,18.642 -65.347,18.079 R37.1 R18.2 ; Q1.6@-58.387,43.201 Q1.6
  Top Layer w0.2: U9.3@-66.506,20.991 -66.489,21.008 v2(-66.489,23.417) ; v2(-58.387,41.837) Q1.6@-58.387,43.201
  Bottom Layer w0.2: v2(-66.489,23.417) -66.489,31.912 -58.387,40.014 v2(-58.387,41.837)
GND: BT1.1 BT1.2 BT2.1 BT2.2 C1.1 C2.1 C3.1 C4.1 C5.1 C11.1 C12.1 C13.1 C19.1 C20.1 C22.1 C23.1 C25.1 C28.1 C29.1 C30.1 C31.1 C33.1 C34.1 C35.1 C38.1 C39.1 C40.1 C41.1 C42.1 C43.1 C44.1 C45.1 C48.1 C49.1 D1.2 D2.1 D3.1 D4.1 D5.1 D6.2 D7.1 D14.2 D15.1 D16.1 J1.A1_B12 J1.B1_A12 J1.S1 J1.S2 J1.S3 J1.S4 J3.2 J7.A1_B12 J7.B1_A12 J7.S1 J7.S2 J7.S3 J7.S4 J10.1 R2.1 R5.1 R6.1 R7.1 R8.1 R9.1 R10.1 R11.1 R12.2 R13.2 R21.1 R23.1 R25.2 R27.2 R28.1 R38.1 R42.1 SW1.SH U1.18 U1.GND U3.2 U3.3 U5.5 U6.1 U7.13 U7.GND U8.1 U9.1 U9.15 U9.38 U9.GND U10.3 U10.29
  other v1: -65.7,43.9 -64.6,43.9 -63.5,43.9 -65.7,45 -64.6,45 -63.5,45 -65.7,46.1 -64.6,46.1 -63.5,46.1
"HY CS": R5.2 U2.3 | length 1.9
  Top Layer w0.15: U2.3 -14.636,36.136 -14.636,34.32 R5.2
"HY OC": U2.2 U3.4 | length 9.5
  Top Layer w0.15: U2.2 -13.842,37.15 -13.748,37.056 -13.748,36.12 -13.172,35.543 -10.83,35.543 -10.554,35.819 -8.213,35.819 -8.125,35.732 U3.4
"HY OD": U2.1 U3.5 | length 12.5
  Top Layer w0.15: v1(-15.868,38.083) -15.86,38.092 -14.708,38.092 U2.1 ; U3.5@-8.118,40.007 U3.5 -8.125,41.09 -8.047,41.168 -8.045,41.168 -7.786,41.427 v1(-7.664,41.427)
  Bottom Layer w0.15: v1(-15.868,38.083) -12.524,41.427 v1(-7.664,41.427)
"HY VC": R4.1 U2.4 | length 5.6
  Top Layer w0.15: R4.1 -14.697,39.647 -14.697,39.101 -14.464,38.868 -13.638,38.868 -13.313,38.542 -13.313,36.516 -12.997,36.2 U2.4
"HY VDD": R3.1 U2.5 | length 3
  Top Layer w0.15: R3.1 -12.879,39.629 -12.879,37.779 -12.25,37.15 U2.5
IO0: BT1.3 BT1.4 C34.2 Q1.3 U9.25 | length 18.6
  Top Layer w0.15: Q1.3 -53.406,44.506 -52.545,43.645 U9.25 -49.605,38 BT1.4@-49.574,37.969 ; C34.2 BT1.4@-49.574,37.969 ; BT1.3 BT1.4 BT1.4@-49.574,37.969
"IP BAT ST": R14.2 U1.5 | length 5.5
  Top Layer w0.15: R14.2 -27.4,44.9 -26.298,46.002 -24.24,46.002 -24.15,45.912 U1.5
"IP BST": C8.1 U1.14 | length 1.6
  Top Layer w0.15: U1.14 -24.15,41.175 -23.96,40.985 -23.96,40.735 -23.55,40.325 C8.1
"IP ISET": R6.2 U1.11 | length 5.1
  Top Layer w0.15: R6.2 -28.3,39.9 -26.6,41.6 -26.6,42.4 -26.15,42.85 U1.11
"IP LED": R15.2 U1.6 | length 4.8
  Top Layer w0.15: R15.2 -27.6,43.9 -26,45.5 U1.6
"IP LX": C8.2 L1.2 U1.15 U1.16 U1.17 | length 1
  Top Layer w0.2: U1.15 U1.16 U1.17
"IP NTC": R11.2 U1.4 | length 6.1
  Top Layer w0.15: R11.2 -28,45.9 -27.5,46.4 -23.85,46.4 -23.65,46.2 U1.4
"IP OVSET": R10.2 U1.9 | length 5.2
  Top Layer w0.15: R10.2 -27.9,40.9 -27,41.8 -27,42.7 -25.85,43.85 U1.9
"IP TSET": R8.2 U1.7 | length 4.3
  Top Layer w0.15: R8.2 -28,42.9 -26.05,44.85 U1.7
"IP UVSET": R9.2 U1.8 | length 4.9
  Top Layer w0.15: R9.2 -27.7,41.9 -27.4,42.2 -27.4,42.9 -25.95,44.35 U1.8
"IP VIN": C3.2 R1.2 U1.12 U1.13 | length 4.9
  Top Layer w0.15: v1(-25.9,41.7) U1.13 -24.65,40.505 C3.2
  Bottom Layer w0.2: R1.2 -26.475,41.125 v1(-25.9,41.7)
"IP VSET": R7.2 U1.3 | length 6.8
  Top Layer w0.15: R7.2 -28.7,46.95 -23.675,46.95 -23.15,46.425 U1.3
"IP VSYS": C12.2 C13.2 U1.19 U1.20 | length 3.7
  Top Layer w0.15: U1.20 U1.19 -21.05,42.35 -20.6,41.9 C13.2 C12.2
IR1: J10.3 U9.10 | length 20.9
  Top Layer w0.2: v1(-57.631,8.794) -57.631,20.994 U9.10
  Bottom Layer w0.2: J10.3 -60.26,6.165 v1(-57.631,8.794)
IR2: J10.4 U9.11 | length 20.4
  Top Layer w0.2: v1(-56.361,8.794) -56.361,20.994 U9.11
  Bottom Layer w0.2: J10.4 -57.72,7.435 v1(-56.361,8.794)
IR3: J10.5 U9.12 | length 22.7
  Top Layer w0.2: v1(-55.091,8.794) -55.091,20.994 U9.12
  Bottom Layer w0.2: J10.5 -54.179,1.2 -52.336,3.044 -52.336,6.038 v1(-55.091,8.794)
IR4: J10.6 U9.13 | length 21.7
  Top Layer w0.2: v1(-53.821,8.794) -53.821,20.994 U9.13
  Bottom Layer w0.2: v1(-53.821,8.794) -50.917,5.89 -50.917,2.923 J10.6
IR5: J10.7 U9.14 | length 20.8
  Top Layer w0.2: v1(-52.551,8.794) -52.551,20.994 U9.14
  Bottom Layer w0.2: v1(-52.551,8.794) -50.1,6.342 J10.7
"L DRV BOUT1": J6.1 U7.7 | length 8.9
  Bottom Layer w0.15: U7.7 -37.656,26.666 -36.934,25.944 -36.934,20.801 J6.1
"L DRV BOUT2": J6.2 U7.5 | length 11.6
  Bottom Layer w0.2: U7.5 -35.933,27.966 -35.371,27.404 -35.371,20.663 -35.89,20.145 J6.2
"L DRV IN1": U7.10 U7.15 U9.23 | length 16.8
  Top Layer w0.2: U9.23 -47.947,33.945 -46.187,32.185 v1(-46.187,29.918) -46.152,29.882 -46.152,25.386 v1(-46.116,25.351)
  Bottom Layer w0.15: v1(-46.187,29.918) v1@-46.186,29.917 ; U7.15 U7.15
  Bottom Layer w0.2: v1@-46.186,29.917 U7.15 ; v1(-46.116,25.351) -46.116,26.466 -45.967,26.616 -44.858,26.616 U7.10
NetBT2_4: BT2.4 C35.2 R18.1 | length 2.2
  Top Layer w0.2: BT2.4 -67.257,16.158 C35.2 R18.1
NetD4_2: D4.2 R14.1 | length 1.3
  Top Layer w0.15: D4.2 -30.25,44.7 -30.05,44.9 R14.1
NetD5_2: D5.2 R15.1 | length 3.7
  Top Layer w0.15: D5.2 -32.7,44.1 -32.5,43.9 R15.1
NetD7_2: D7.2 R16.2 | length 12.8
  Top Layer w0.2: D7.2@-41.294,2.289 D7.2 -41.307,4.932 -39.817,6.422 R16.2
NetJ7_A5: J7.A5 R38.2 | length 2.1
  Top Layer w0.15: R38.2 J7.A5
NetJ7_B5: J7.B5 R42.2 | length 2.6
  Top Layer w0.15: R42.2@-65.342,49.761 J7.B5
NetR17_1: R17.1 R21.2 U5.3 | length 2.6
  Top Layer w0.2: U5.3 -44.247,3.77 -43.862,3.385 -43.862,3.36 -43.712,3.21 R21.2 -43.686,3.208 -43.686,2.389 R17.1
NetU3_1: U3.1 U3.8
"R DRV AOUT1": J5.1 U7.2 | length 11.1
  Bottom Layer w0.2: U7.2 -36.594,29.916 -35.739,30.771 -35.739,32.933 -38.807,36.001 J5.1
"R DRV AOUT2": J5.2 U7.4 | length 12.5
  Bottom Layer w0.2: U7.4 -35.904,28.616 -35.13,29.389 -35.13,35.275 J5.2
"R DRV IN1": U7.9 U7.16 U9.26 | length 21.8
  Top Layer w0.2: U9.26 -53.815,36.602 -53.187,35.974 ccw(c-53.046,36.115) -53.046,35.915 -47.895,35.915 cw(c-47.895,35.715) -47.753,35.856 -44.784,32.887 -44.784,31.739 -44.812,31.712 v1@-44.814,31.709 ; v1(-44.817,25.114) -44.814,25.116 -44.814,31.69 v1(-44.812,31.693)
  Bottom Layer w0.2: v1(-44.817,25.114) -44.817,26.007 U7.9 ; v1(-44.812,31.693) -44.812,30.569 U7.16
  other v1: -60.124,23.052
RTS: Q1.1 Q1.5 U10.24 | length 6.2
  Top Layer w0.15: Q1.5 -57.805,43.856 -57.155,43.206 Q1.1
  Top Layer w0.2: U10.24 -61.174,44.5 -60.53,43.856 Q1.5
RXD: R41.1 U10.25 | length 4
  Top Layer w0.2: U10.25 -60.323,45 v1@-59.58,45.744
  Bottom Layer w0.2: v1(-59.606,45.769) -59.58,45.743 -59.58,44.73 R41.1
RXD0: R43.2 U9.34 | length 8.1
  Top Layer w0.2: U9.34 -63.975,40.458 -63.221,41.212 -61.872,41.212 v1(-60.473,42.611) ; U9.34@-63.718,38.261 U9.34@-63.708,38.27
  Bottom Layer w0.2: R43.2 -60.478,42.796 -60.485,42.789 -60.485,42.623 v1(-60.473,42.611)
SCL: J3.3 R40.1 U9.28 | length 29
  Top Layer w0.15: U9.28 -56.35,38.005 R40.1 -56.342,40.008 -56.342,41.111 v1(-56.333,41.119)
  Bottom Layer w0.15: v1(-56.333,41.119) -45.616,51.836 -43.384,51.836 -39.061,56.16
  Bottom Layer w0.2: -39.061,56.16 J3.3
SDA: J3.4 R39.1 U9.27 | length 31.6
  Top Layer w0.15: U9.27 -55.05,38.035 R39.1 -55.056,40.006 -55.056,41.109 v1(-55.062,41.115)
  Bottom Layer w0.15: v1(-55.062,41.115) -51.543,44.634 -45.902,44.634 -36.48,54.056 -36.48,58.518 J3.4
"SW IN": F2.2 SW1.2 | length 4
  Bottom Layer w0.2: F2.2 -33.015,7.578 SW1.2
TXD: R43.1 U10.26 | length 2.9
  Top Layer w0.2: U10.26 -61.2,45.5 -60.963,45.737 -60.573,45.737 v1(-60.541,45.769)
  Bottom Layer w0.2: v1(-60.541,45.769) -60.509,45.738 -60.509,44.735 R43.1
TXD0: R41.2 U9.35 | length 10.4
  Top Layer w0.2: v1(-65.273,40.214) -65.245,40.186 U9.35
  Bottom Layer w0.2: v1(-65.273,40.214) -65.241,40.245 -61.388,40.245 -59.554,42.079 R41.2
"USB CC1": J1.A5 R12.1 | length 2.1
  Top Layer w0.2: R12.1 -17.145,50.405 -17.145,52.455 J1.A5
"USB CC2": J1.B5 R13.1 | length 2.1
  Top Layer w0.15: R13.1 -20.145,50.405 -20.145,52.455 J1.B5
USB_MCU_N: D16.2 J7.A7 J7.B7 U10.5 | length 9.3
  Top Layer w0.2: U10.5 -65.07,47.43 -65.07,47.921 -65.013,47.978 -65.013,48.31 -64.534,48.79 -64.083,48.79 -63.756,49.117 -63.756,51.585 -63.792,51.621 -63.792,52.328 J7.A7 ; J7.A7@-63.827,52.577 -63.827,53.451 v3(-63.813,53.465) ; J7.B7 -62.842,53.213 v3(-62.544,53.511)
  Bottom Layer w0.2: v3(-63.813,53.465) -63.79,53.488 -62.567,53.488 v3(-62.544,53.511)
USB_MCU_P: D15.2 J7.A6 J7.B6 U10.4 | length 9.2
  Top Layer w0.2: U10.4 -64.63,47.43 -64.63,47.921 -64.687,47.978 -64.687,48.175 -64.399,48.463 -63.948,48.463 -63.429,48.982 -63.429,51.585 -63.392,51.621 -63.392,52.328 J7.A6 ; J7.B6 -64.342,53.611 -64.011,53.942 -63.616,53.942 -63.336,53.663 -63.336,52.79 J7.A6@-63.359,52.767
USBCHARGER_N: D2.2 J1.A7 J1.B7 U1.1 | length 11.6
  Top Layer w0.2: U1.1 -22.175,45.525 -22.175,46.1 -22.177,46.102 -22.177,46.389 -21.751,46.815 -20.513,46.815 -18.726,48.601 -18.726,51.667 -18.69,51.703 -18.69,52.41 J1.A7 J1.A7@-18.61,52.43 ; -18.711,51 -17.8,51 -17.64,51.16 J1.B7
USBCHARGER_P: D3.2 J1.A6 J1.B6 U1.2 | length 11.9
  Top Layer w0.2: U1.2 -22.65,46.378 -21.887,47.142 -20.648,47.142 -19.053,48.737 -19.053,51.667 -19.09,51.703 -19.09,52.41 J1.B6 ; J1.B6@-19.133,52.671 -19.133,53.347 -19.016,53.464 -18.26,53.464 -18.14,53.344 J1.A6
VBUS: C38.2 C43.2 C44.2 D14.1 J7.A4_B9 J7.B4_A9 U10.7 U10.8 | length 12.7
  Top Layer w0.5: v1@-66.017,51.043 v1(-66.017,51.1) -66.004,51.113 -66.004,52.321 J7.B4_A9@-65.979,52.346
  Bottom Layer w0.5: v1(-67.1,47.5) -67.1,50.017 v1(-66.017,51.1) v1(-58.701,51.1)
VDD: C41.2 C42.2 U10.6 | length 3.7
  Top Layer w0.3: C42.2 -67.417,49.875 -67.132,49.59 -67.117,49.59 -66.819,49.293 C41.2 -66.814,48.563 -66.01,48.563 -65.6,48.153 U10.6
pads on no net: BT2.3 J1. J1.A8 J1.B8 J7. J7.A8 J7.B8 SW1.1 U1.10 U6.5 U8.5 U9.4 U9.5 U9.6 U9.8 U9.9 U9.17 U9.18 U9.19 U9.20 U9.21 U9.22 U9.24 U9.29 U9.30 U9.31 U9.32 U9.33 U9.36 U9.37 U10.1 U10.2 U10.9 U10.10 U10.11 U10.12 U10.13 U10.14 U10.15 U10.16 U10.17 U10.18 U10.19 U10.20 U10.21 U10.22 U10.23 U10.27
copper on no net: | length 0
  Top Layer w0.2: -65.245,21 -65.231,21.014

## Polygon pours and split planes (outlines as drawn)
"IP LX" on Top Layer "NONET_L-01_P-001" (solid, remove dead copper, pour order 19): -22.825,42.035 -22.45,42.035 -22.45,40.988 -22.036,40.574 -22.036,39.85 -20.976,38.79 -19.249,38.79 -19.249,36.853 -24.797,36.853 -24.797,38.79 -23.52,38.79 -22.995,39.315 -22.995,41.185 -22.825,41.356 -22.825,41.363
VBUS on Top Layer "NONET_L-01_P-001" (solid, remove dead copper, pour order 18): -65.965,47.902 -68.479,47.902 -68.479,47.145 -69.005,46.619 -69.005,45.785 -68.856,45.637 -67.992,45.637 -67.992,45.875 -67.495,46.372 -66.624,46.372 -65.891,47.106 -65.891,47.828
"BUCK1 SW" on Top Layer "BUCK1_SW_L01_P016" (solid, pour order 16): -12.904,27.402 -4.845,27.403 -4.845,25.043 -11.14,25.043 -11.241,25.144 -11.241,26.24 -11.768,26.767 -12.904,26.767
"BUCK2 SW" on Top Layer "BUCK2_SW_L01_P015" (solid, pour order 15): -12.352,15.133 -4.613,15.133 -4.482,15.002 -4.482,12.856 -4.635,12.704 -10.792,12.704 -10.792,12.711 -10.951,12.87 -10.951,13.923 -11.463,14.436 -12.4,14.436 -12.4,15.085
+VBAT on Top Layer "+VBAT_L01_P014" (solid, pour order 14): -12.363,15.41 -10.18,15.41 -10.112,15.479 -10.112,17.456 -10.245,17.589 -10.251,17.583 -12.24,17.583 -12.4,17.423 -12.4,15.412
+VBAT on Top Layer "+VBAT_L01_P013" (solid, pour order 13): -12.673,27.715 -10.466,27.715 -10.466,30.056 -12.033,30.056 -12.7,29.39 -12.7,27.732
+3V3 on Top Layer "+3V3_L01_P012" (solid, pour order 12): -13.809,10.005 -11.745,10.005 -10.853,10.897 -10.853,11.309 -4.537,11.309 -4.487,11.259 -4.487,9.079 -4.565,9.001 -10.844,9.001 -10.928,9.085 -13.797,9.085 -13.856,9.144 -13.856,9.957
VBUS on Top Layer "NONET_L-01_P-001" (solid, remove dead copper, pour order 11): -61.497,52.993 -61.497,51.295 -60.386,50.184 -60.386,47.151 -60.381,47.146 -59.454,47.146 -59.454,47.999 -58.196,49.257 -58.197,49.258 -58.197,51.511 -60.91,51.511 -60.91,52.993
+3V3 on Top Layer "NONET_L-01_P-001" (solid, remove dead copper, pour order 10): -68.242,20.318 -68.236,20.311 -68.236,18.777 -67.935,18.477 -67.935,16.832 -66.992,16.832 -66.992,19.684 -67.328,20.02 -67.328,21.978 -68.257,21.978 -68.259,21.976 -68.242,21.959 -68.242,20.315
+5V on Top Layer "NONET_L-01_P-001" (solid, remove dead copper, pour order 9): -4.739,23.529 -11.222,23.529 -11.222,22.813 -11.835,22.2 -18.564,22.2 -18.564,21.244 -4.739,21.244
no net on Top Layer "NONET_L-01_P-001" (hatched Horizontal grid 0.508 track 0.203, remove dead copper, pour order 7): -11.048,23.537 -11.039,23.529 -4.812,23.529 -4.812,21.342 -4.81,21.34 -4.871,21.279 -11.055,21.279
"+5V SYS" on Top Layer "NONET_L-01_P-001" (solid, remove dead copper, pour order 4): -16.885,37.4 -18.3,37.4 -18.3,39.685 -16.885,39.685
"+5V USB" on Top Layer "NONET_L-01_P-001" (solid, remove dead copper, pour order 2): -11.2,51.7 -10.9,51.4 -10.9,50.1 -11.2,49.8 -14.4,49.8 -14.9,50.3 -14.9,51.4 -14.6,51.7 -12.7,51.7
BAT+ on Top Layer "NONET_L-01_P-001" (solid, remove dead copper, pour order 0): -21.8,44 -21.1,44 -20.5,44.6 -19.9,44.6 -19.7,44.4 -19.7,42.8 -20.5,42.8 -20.9,43.2 -21.8,43.2
BAT+ on Bottom Layer "NONET_L-01_P-001" (solid, remove dead copper, pour order 1): -20.715,45.4 -18,45.4 -18,43.8 -19,42.8 -20.715,42.8

## Keep-outs
Keep-Out Layer:
  the board outline again, w0.3